# Allegro board test.brd
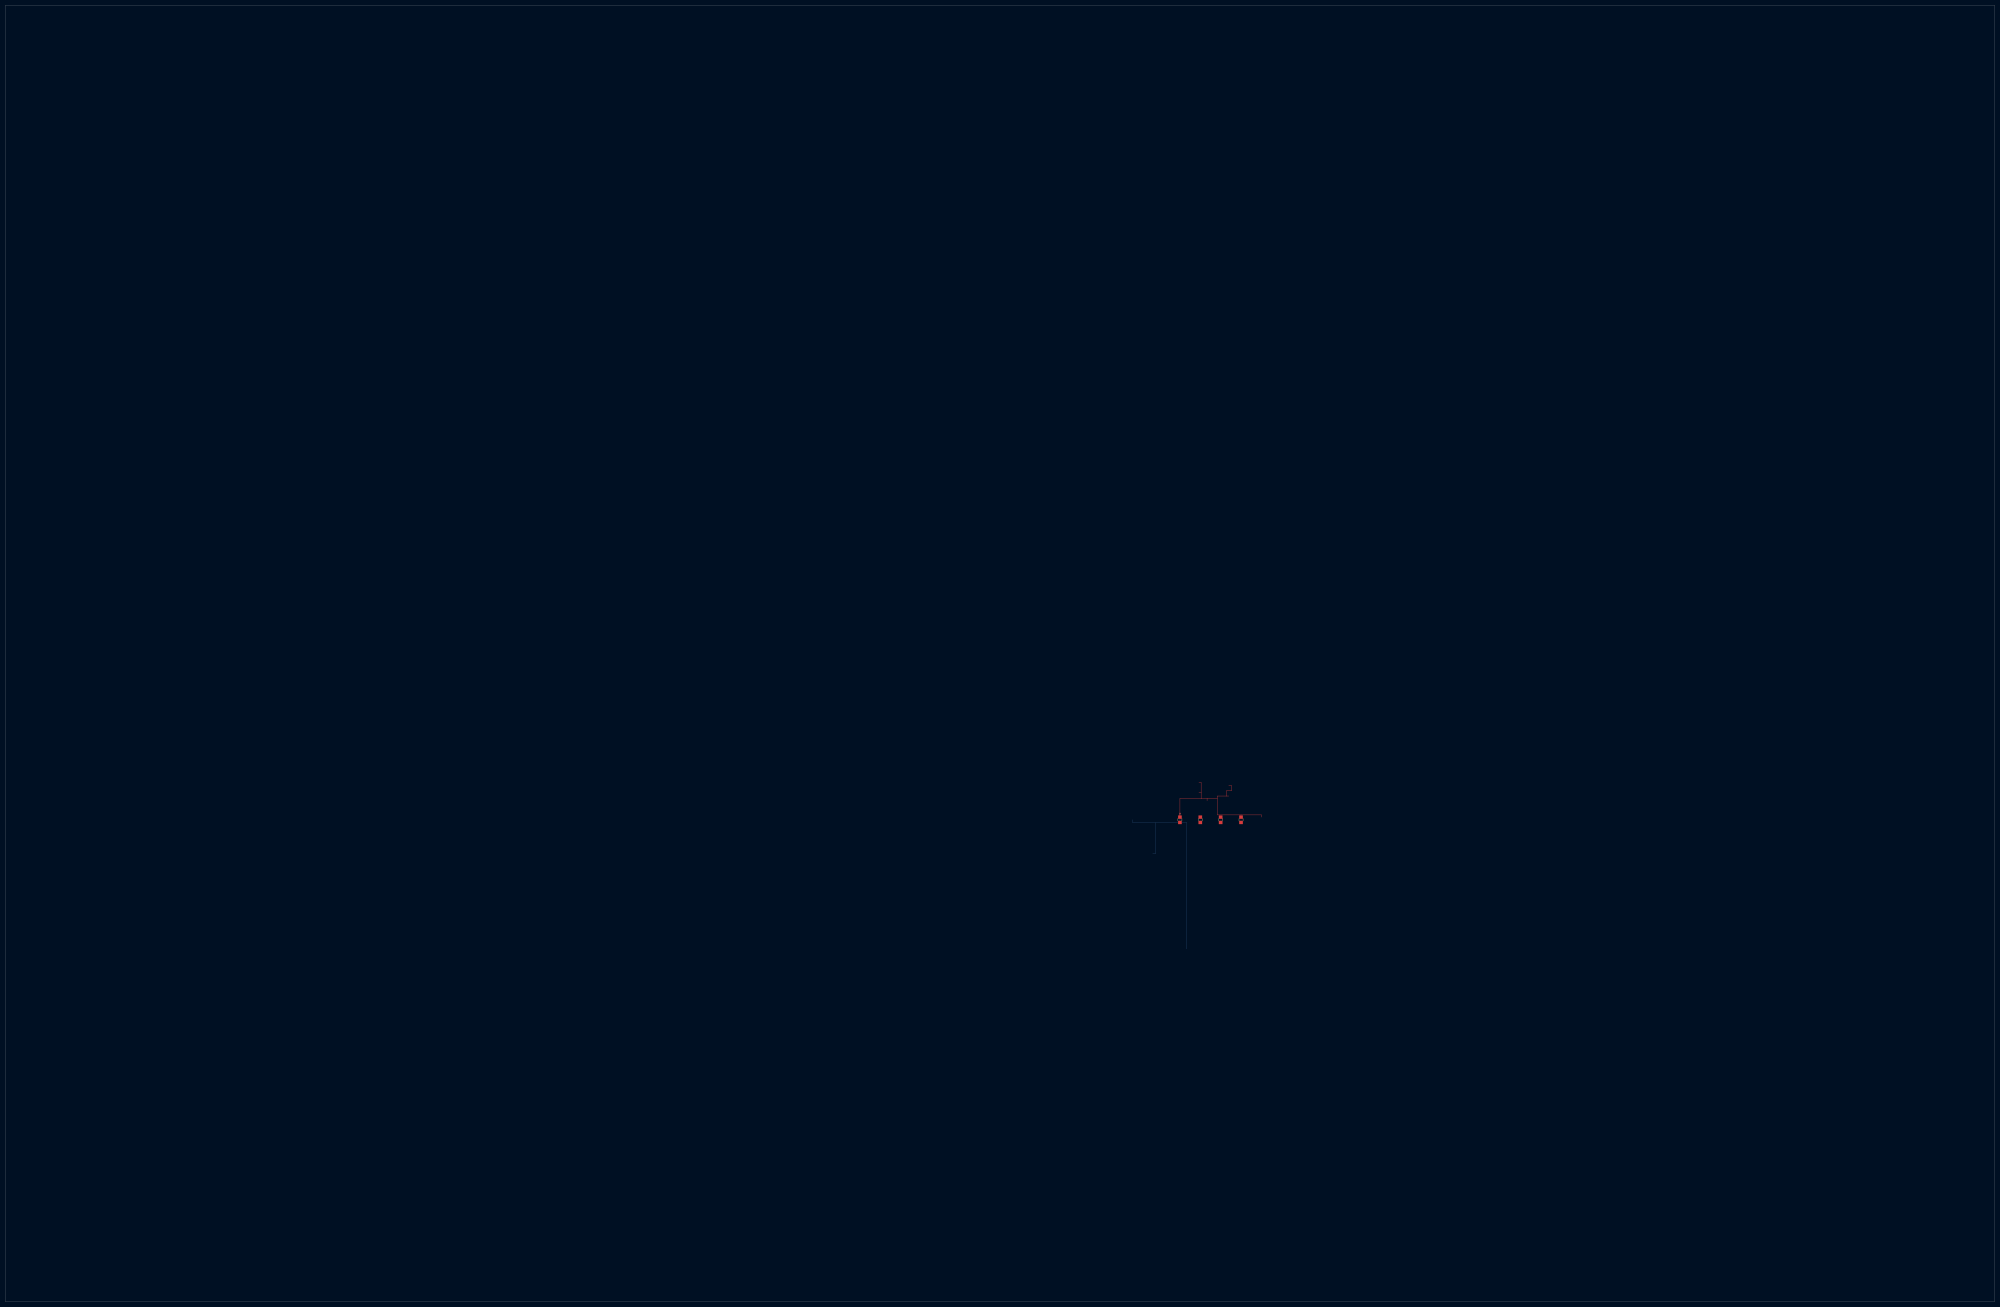
[diagram p0: board, top side]
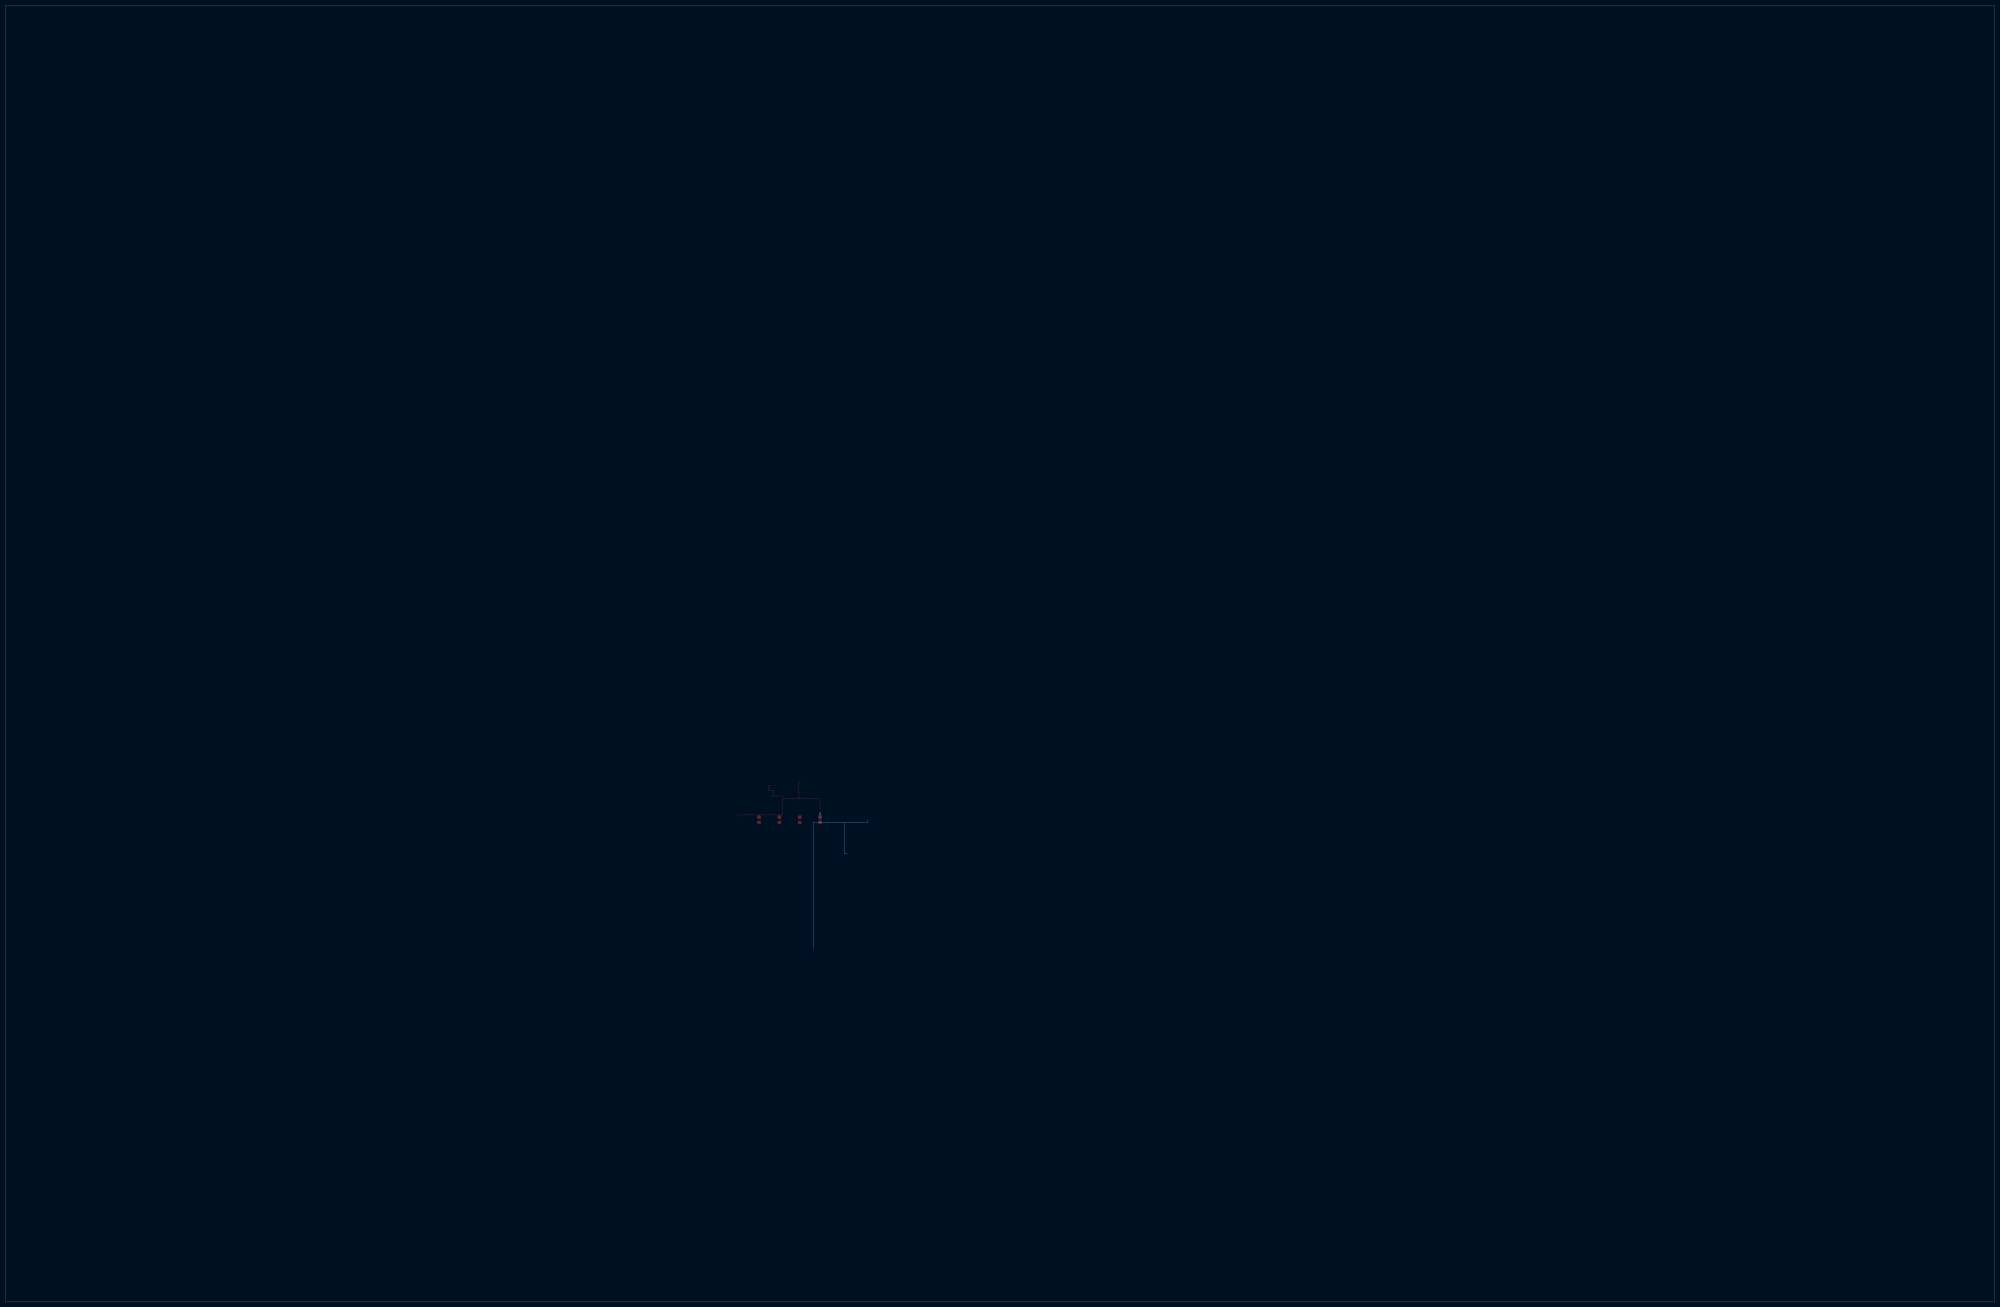
[diagram p1: board, bottom side, seen from below]

Outline 744.22 x 485.14 mm; copper layers: TOP, MYPLANE, VCC, BOTTOM. Coordinates in mm from the lower left corner of the outline.
Outline path: 0,485.14 0,0 744.22,0 744.22,485.14 0,485.14

## Placement (name value [footprint] x y rotation side)
C3  1.0UF  [CAP805]  439.42 180.34 0 top
C4  1.0UF  [CAP805]  447.04 180.34 0 top
C5  1.0UF  [CAP805]  454.66 180.34 0 top
C6  1.0UF  [CAP805]  462.28 180.34 0 top

## Library data of the parts
C3-C6 = CSMD0805: part number: CSMD0805-1.0UF,10%,0805,25V

## Footprints (pads in the part's own frame, mm; a bottom-side part is the same pattern mirrored in y, then rotated)
CAP805
  rect 1.372x1.27 smd: 1(0,1) 2(0,-1)

## Nets
VCC: C5.2(B<0>) C6.2(B<0>)
VCC5M: C3.2(B<0>) C4.2(B<0>)
UNNAMED_1_CSMD0805_I6_A: C5.1(A<0>)
UNNAMED_1_CSMD0805_I9_A: C3.1(A<0>)
UNNAMED_1_CSMD0805_I10_A: C6.1(A<0>)
UNNAMED_1_CSMD0805_I11_A: C4.1(A<0>)

## Via types
v1: diameter 0.61, hole 0.33, TOP to BOTTOM, 1 via

## Routing (per net, layer and track width the routed paths; a pad name or vN(x,y) marks a point on that pad's centre or on a via; arc(x,y) is an arc through that point)
UNNAMED_1_CSMD0805_I9_A: length 150.3
  TOP w0.127: 456.88,189.23 456.88,191.26 458.79,191.26 458.79,193.04 457.71,193.04 ; 456.88,189.23 453.39,189.23 453.39,188.28 ; 456.88,189.23 457.71,189.23 ; 453.39,188.28 449.58,188.28 ; 453.39,188.28 453.39,182.17 462.28,182.17 ; 449.58,188.28 449.58,187.45 ; 449.58,188.28 447.36,188.28 ; C3.1 v1(439.42,182.66) 439.42,188.28 447.36,188.28 ; 447.36,190.5 447.36,188.28 ; 447.36,190.5 447.36,194.31 446.53,194.31 ; 447.36,190.5 446.53,190.5 ; 462.28,182.17 469.9,182.17 469.9,181.34 ; 462.28,182.17 462.28,181.34
  BOTTOM w0.127: 429.26,167.64 430.21,167.64 430.21,179.39 ; 430.21,179.39 421.64,179.39 421.64,180.34 ; 430.21,179.39 439.42,179.39 ; 441.96,132.08 441.96,179.39 439.42,179.39 ; 439.42,179.39 v1(439.42,182.66)
